# Altium PCB PCB.PcbDoc
Units mil, origin at the board's own origin, x right, y up, seen from the top; angles counter-clockwise.
Board outline 6000 x 4000 mil, 2 copper layers (Top Layer, Bottom Layer); 8 components, 0 nets, 16 pads, 0 vias.
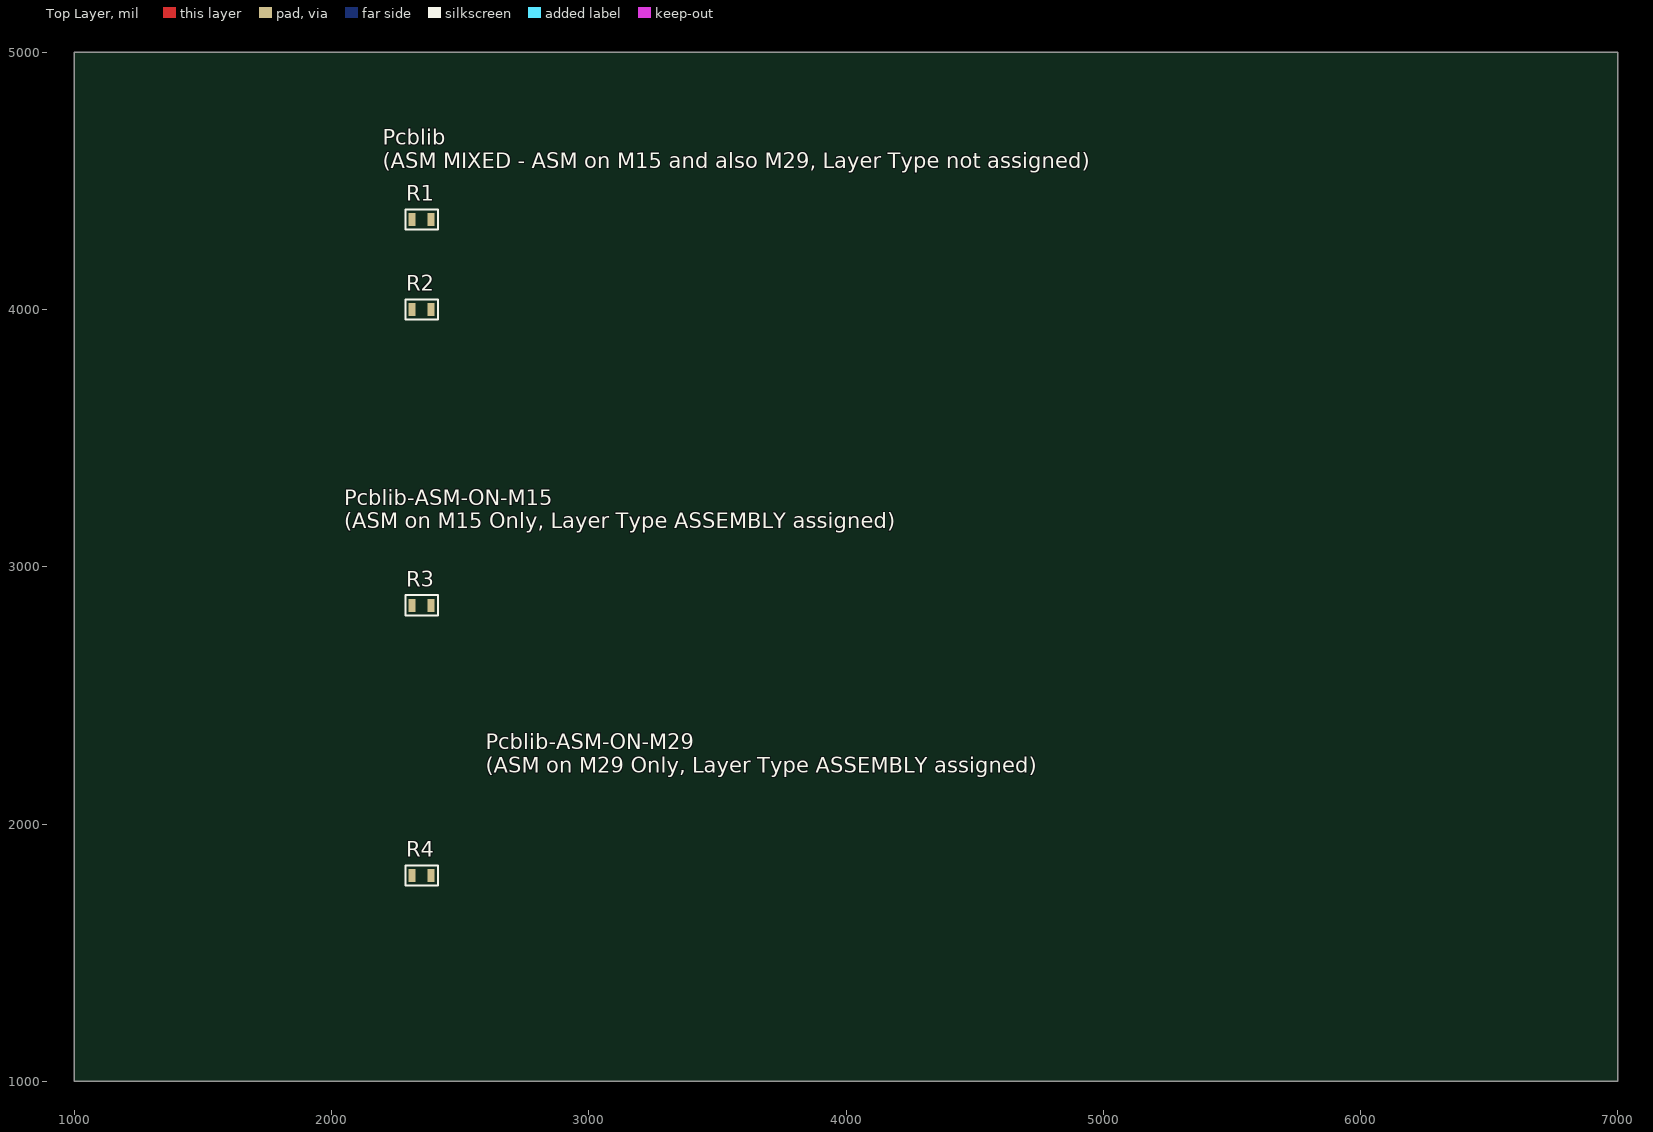
[diagram p0: Top Layer view]
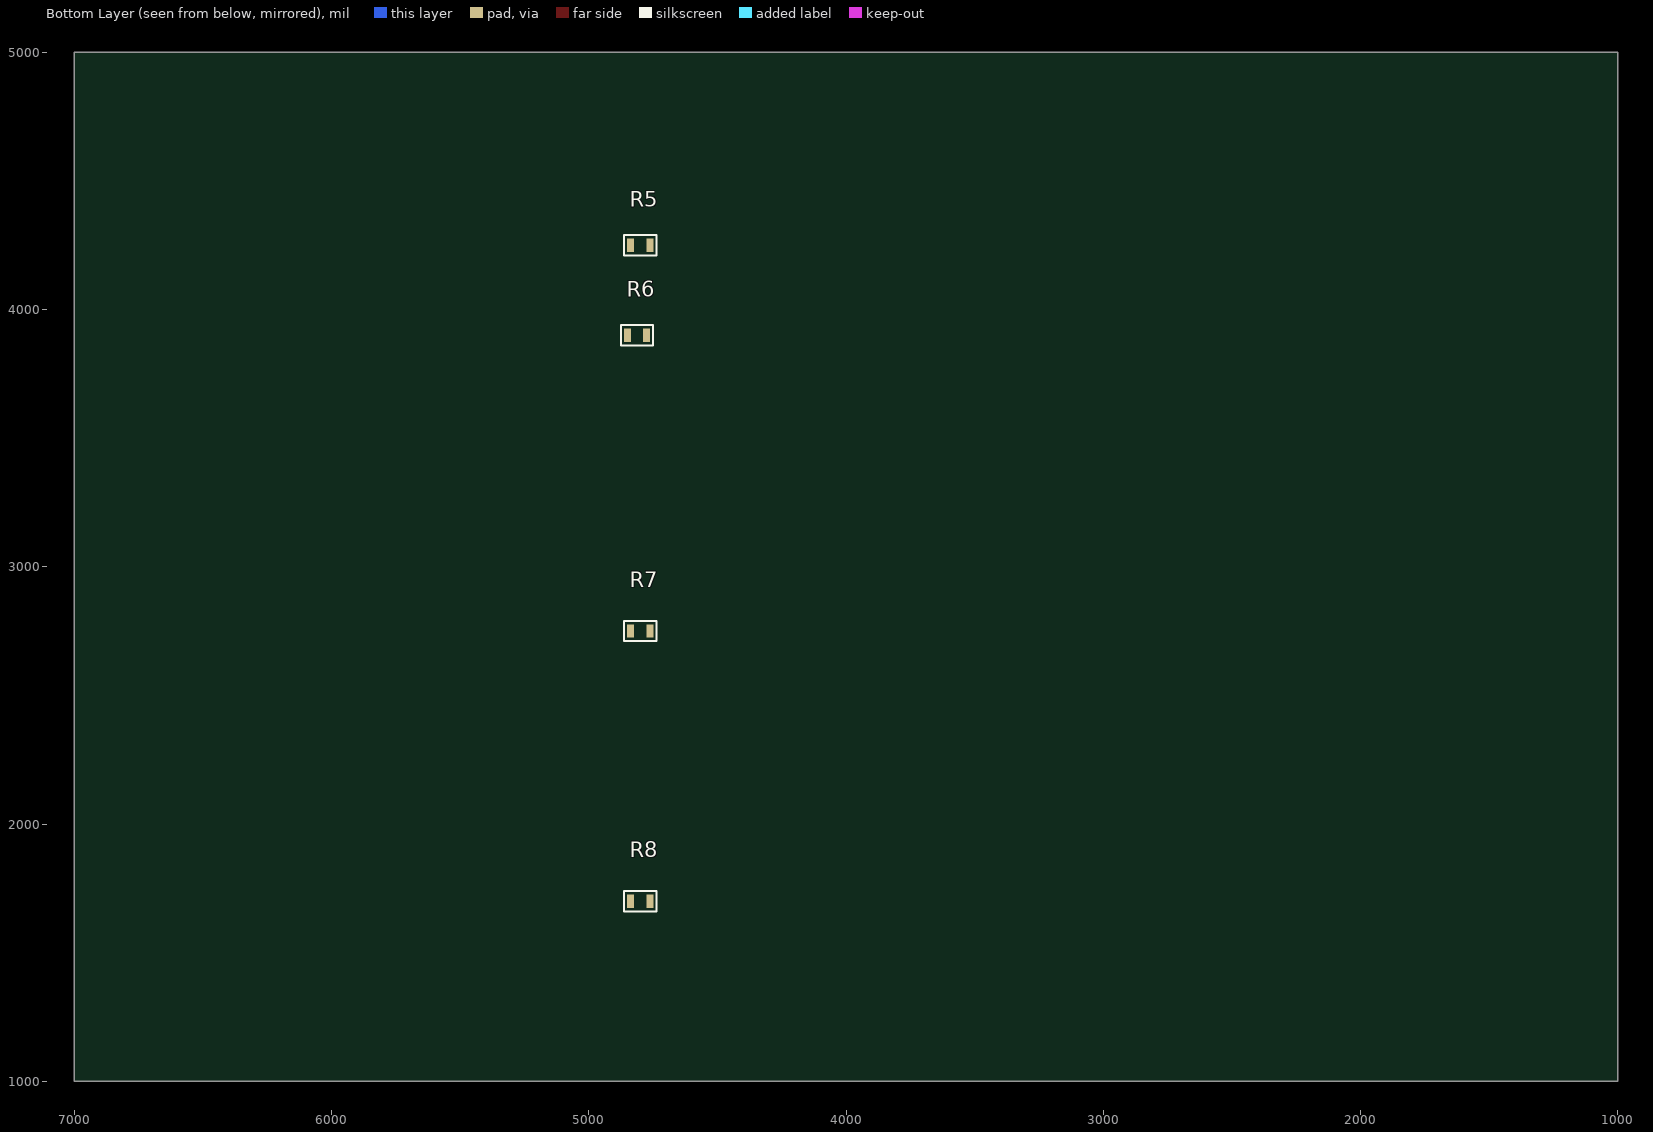
[diagram p1: Bottom Layer view, seen from below]

## Layer stack, top to bottom
Top Solder: solder mask 0.4, Solder Resist, Dk 3.5
Top Layer: signal copper 1.4
Dielectric 1: dielectric 12.6, FR-4, Dk 4.8
Bottom Layer: signal copper 1.4
Bottom Solder: solder mask 0.4, Solder Resist, Dk 3.5

## Board outline
1000,1000 7000,1000 7000,5000 1000,5000

## Design rules (kind name [scope] priority, off if disabled: settings)
Clearance [All] p1: gap=10 ignorepadtopadclearanceinfootprint=FALSE except(0: Arc-Hole Track-Hole SMDPad-Hole THPad-Hole Via-Hole Fill-Hole Poly-Hole Region-Hole Text-Hole)
PolygonConnect [All] p1: connectstyle=Relief reliefconductorwidth=10 reliefentries=4 polygonreliefangle="90 Angle" airgapwidth=10
RoutingVias [All] p1: holewidth=28 width=50 viastyle="Through Hole" minholewidth=28 minwidth=50 maxholewidth=28 maxwidth=50
SolderMaskExpansion [All] p1: expansion=4
Width [All] p1: maxlimit=10 minlimit=10 preferedwidth=10
30 further rules are at their usual default settings.

## Components (designator, comment, footprint, x,y, rotation, side; value= is the part's Value field where it differs from the comment)
R1 "RES-ASM-ON-M15" R0805-ASM-ON-M15 2350,4350 r0 top
R2 "RES-ASM-ON-M29" R0805-ASM-ON-M29 2350,4000 r0 top
R3 "RES-ASM-ON-M15" R0805-ASM-ON-M15 2350,2850 r0 top
R4 "RES-ASM-ON-M29" R0805-ASM-ON-M29 2350,1800 r0 top
R5 "RES-ASM-ON-M15" R0805-ASM-ON-M15 4800,4250 r0 bottom
R6 "RES-ASM-ON-M29" R0805-ASM-ON-M29 4812.6,3900 r0 bottom
R7 "RES-ASM-ON-M15" R0805-ASM-ON-M15 4800,2750 r0 bottom
R8 "RES-ASM-ON-M29" R0805-ASM-ON-M29 4800,1700 r0 bottom

## Footprints (in the part's own frame and the unit in brackets; to place one, negate y for a bottom-side part, rotate by r counter-clockwise, add the part's x,y. Pads: shape width x height; smd on the part's side, far side on the other; paste and mask are expansions set on the pad)
R0805-ASM-ON-M15 [mm]
  rect 0.7x1.3 smd: 1(-0.95,0) 2(0.95,0)
  silkscreen extent -1.6,-1 1.6,1
R0805-ASM-ON-M29 [mm]
  rect 0.7x1.3 smd: 1(-0.95,0) 2(0.95,0)
  silkscreen extent -1.6,-1 1.6,1

## Part data
R1 R3 R5 R7: "ASM ON M15"
R2 R4 R6 R8: "ASM ON M29"

## Nets (pads, with @x,y where several pads share a name; then routed paths per layer and width w, separated by ;. In a path a pad name is that pad's centre, name@x,y a point inside that pad or via, vN(x,y) a via of type N, cw(c..) or ccw(c..) an arc to the next point about the centre after c; other vN are vias at no path point)
pads on no net: R1.1 R1.2 R2.1 R2.2 R3.1 R3.2 R4.1 R4.2 R5.1 R5.2 R6.1 R6.2 R7.1 R7.2 R8.1 R8.2

## Silkscreen, mask and mechanical layers (free items; w line width, h text height)
Top Overlay:
  text "Pcblib / (ASM MIXED - ASM on M15 and also M29, Layer Type not assigned)" at 2200,4550 h60
  text "Pcblib-ASM-ON-M15 / (ASM on M15 Only, Layer Type ASSEMBLY assigned)" at 2050,3150 h60
  text "Pcblib-ASM-ON-M29 / (ASM on M29 Only, Layer Type ASSEMBLY assigned)" at 2600,2200 h60